# Allegro board ex2pra.brd
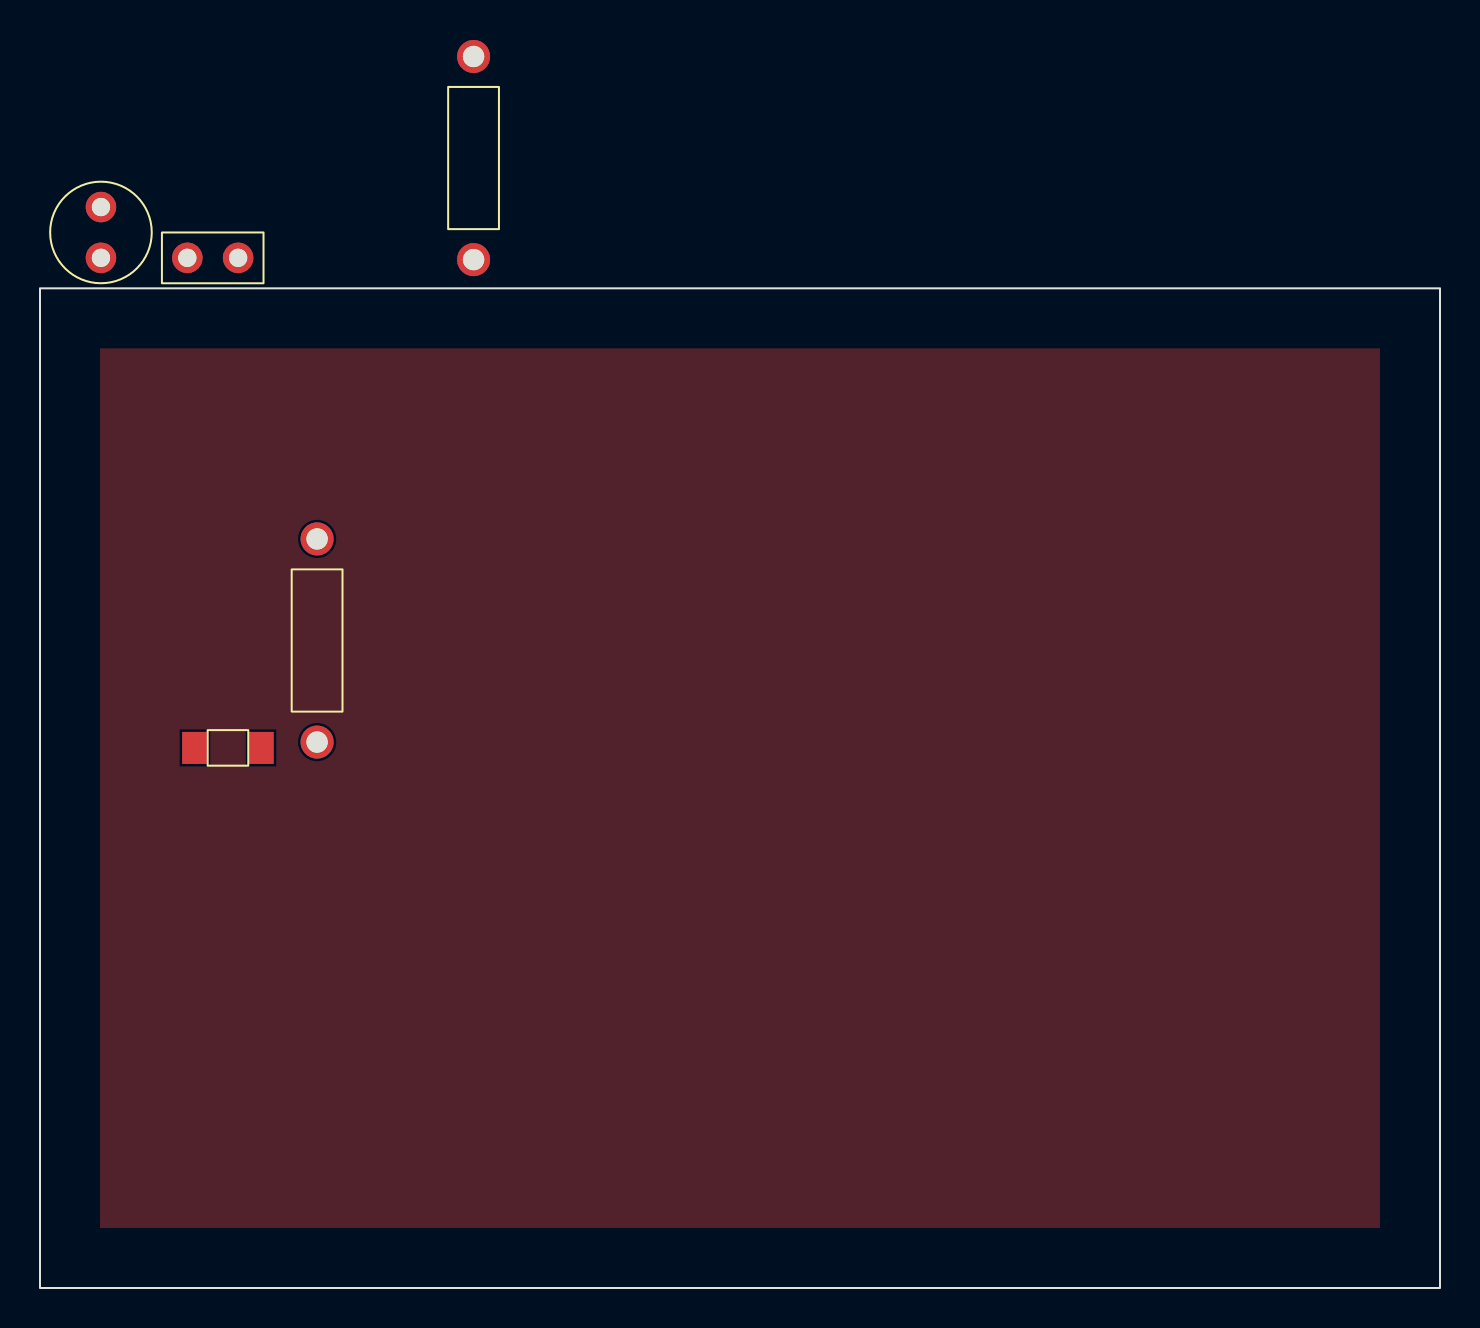
[diagram p0: board, top side]
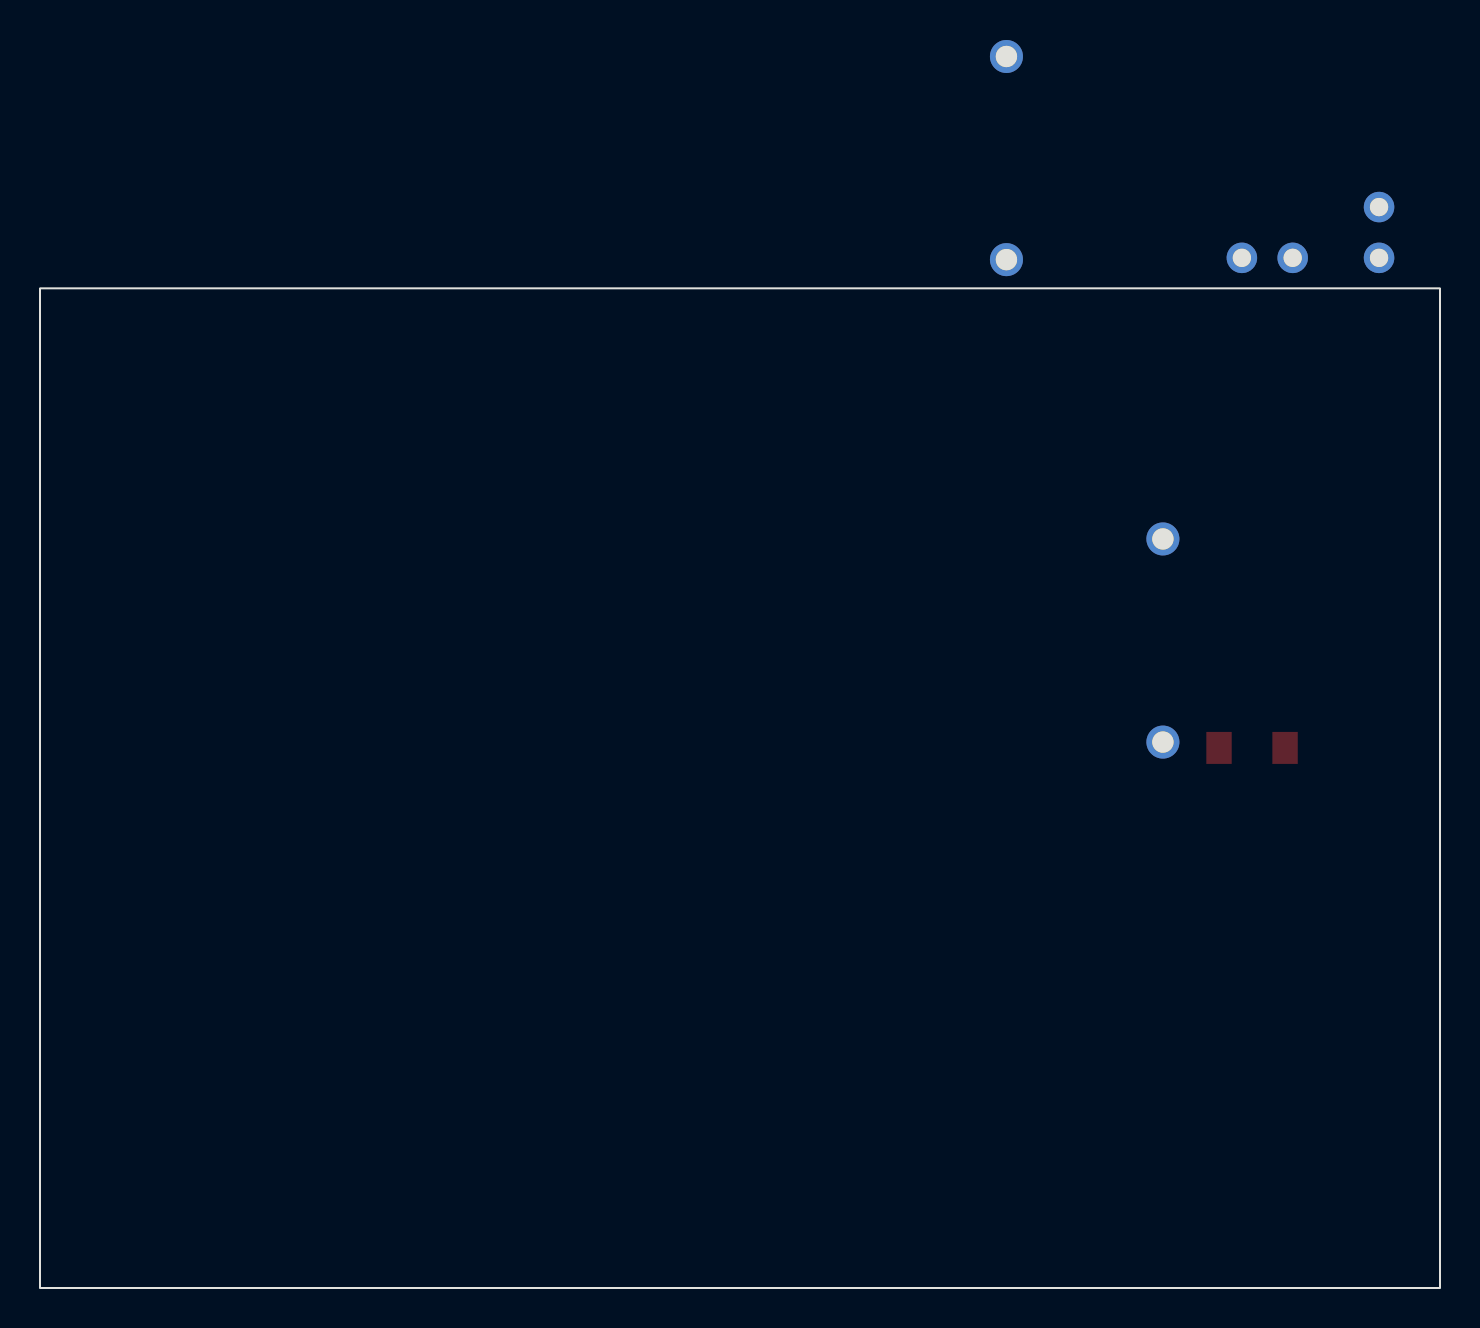
[diagram p1: board, bottom side, seen from below]

Outline 70 x 50 mm; copper layers: TOP, BOTTOM. Coordinates in mm from the lower left corner of the outline.
Outline path: rectangle 0,0 70,50

## Design rules (mm)
net group POWERRULE: nets N00144 N00150
net group CLS1: nets VCC

## Placement (name value [footprint] x y rotation side)
C3  1u  [CAP196]  3.05 51.52 0 top
J1  CON2  [JUMPER2]  7.37 51.52 0 top
L1  100n  [SMDRES]  9.4 27.01 0 top
R1  330  [RES400]  13.86 27.3 0 top
R2  330  [RES400]  21.68 51.44 0 top

## Library data of the parts
C3 = CAP NP: Tolerance: ***; User Part Number: ***
J1 = CON2: User Part Number: ***
L1 = INDUCTOR: Tolerance: ***; User Part Number: ***
R1 R2 = R: Tolerance: ***; User Part Number: ***

## Footprints (pads in the part's own frame, mm; a bottom-side part is the same pattern mirrored in y, then rotated)
CAP196
  round 1.524 hole 0.914: 1(0,0) 2(0,2.54)
JUMPER2
  round 1.524 hole 0.914: 1(0,0) 2(2.54,0)
RES400
  round 1.651 hole 1.067: 1(0,0) 2(0,10.16)
SMDRES
  rect 1.27x1.6 smd: 1(-1.651,0) 2(1.651,0)

## Nets
GND: C3.2 J1.2 R2.2
VCC: J1.1 R1.1
N00144: L1.1 R1.2
N00150: C3.1 L1.2 R2.1

## Copper pours and planes (outline as drawn; the poured copper is in the pictures)
GND on TOP: 3,3 3,47 67,47 67,3
